# Altium PCB Main_.PcbDoc
Units mil, origin at the board's own origin, x right, y up, seen from the top; angles counter-clockwise.
Board outline 6000 x 4000 mil, 2 copper layers (Top Layer, Bottom Layer); 109 components, 96 nets, 475 pads, 21 vias.
Unrouted connection lines stored in the file: 299.
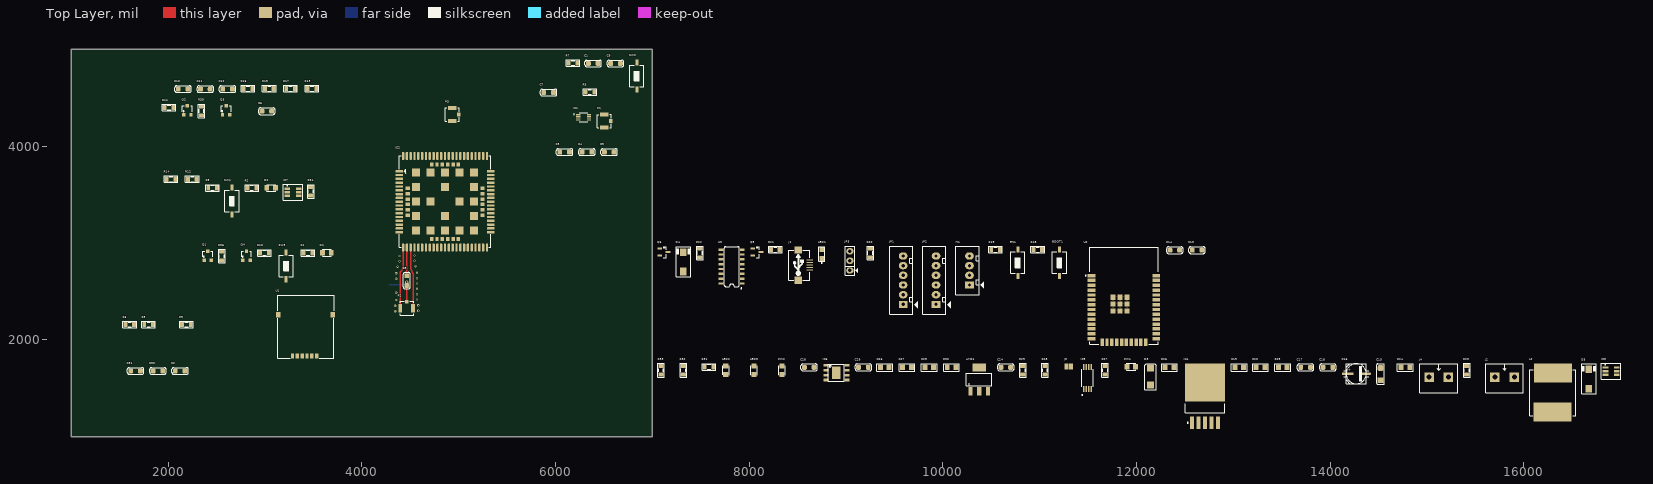
[diagram p0: Top Layer view]
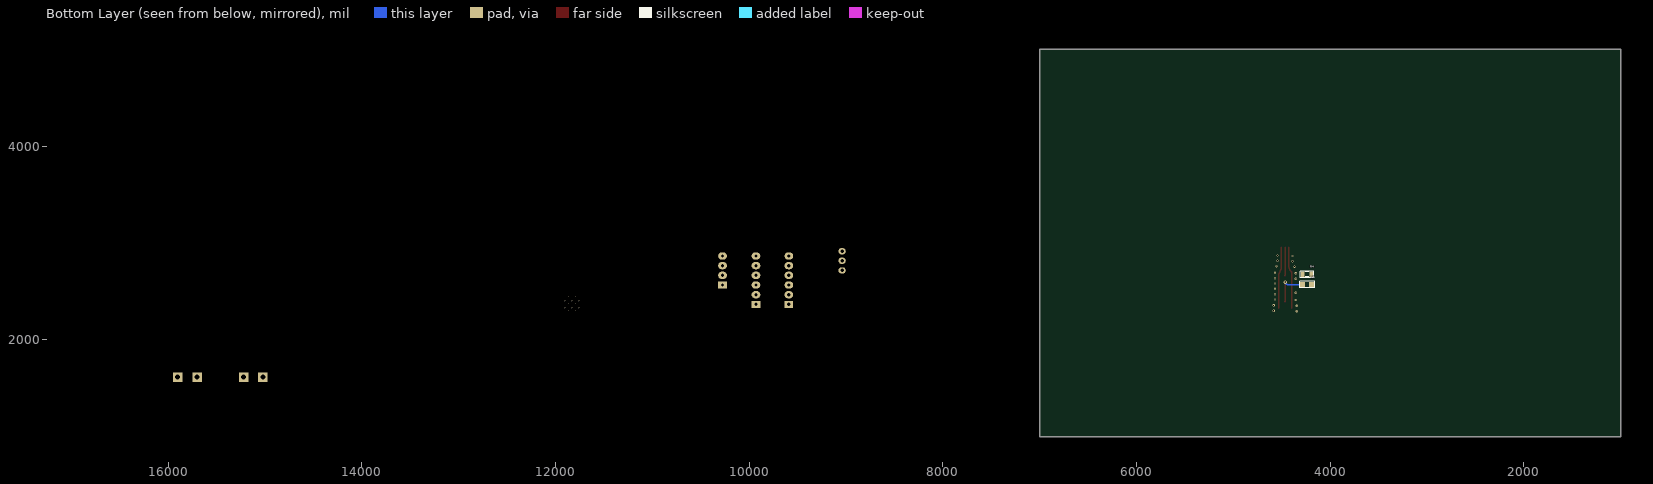
[diagram p1: Bottom Layer view, seen from below]

## Layer stack, top to bottom
Top Solder: solder mask 0.4, Solder Resist, Dk 3.5
Top Layer: signal copper 1.4
Dielectric 1: dielectric 12.6, FR-4, Dk 4.8
Bottom Layer: signal copper 1.4
Bottom Solder: solder mask 0.4, Solder Resist, Dk 3.5

## Board outline
1000,1000 7000,1000 7000,5000 1000,5000

## Design rules (kind name [scope] priority, off if disabled: settings)
Clearance [All] p1: gap=7 ignorepadtopadclearanceinfootprint=TRUE
DiffPairsRouting [All] p1: maxlimit=10 minlimit=10 mostfreqgap=10 toplayer_minwidth=15 toplayer_maxwidth=15 toplayer_prefwidth=15 bottomlayer_minwidth=15 bottomlayer_maxwidth=15 bottomlayer_prefwidth=15 maxuncoupledlength=500
PolygonConnect [All] p1: connectstyle=Relief reliefconductorwidth=10 reliefentries=4 polygonreliefangle="90 Angle" airgapwidth=10
RoomDefinition 2.MCU [InComponentClass('2.MCU')] p1: confinementstyle=ConfineIn formatcopy=TRUE lockcomponents=FALSE outline 7045,1915 12720,1915 12720,3075 7045,3075
RoomDefinition 1.POWER [InComponentClass('1.POWER')] p2: confinementstyle=ConfineIn formatcopy=TRUE lockcomponents=FALSE outline 7045,1060 17010,1060 17010,1865 7045,1865
RoutingVias [All] p1: holewidth=28 width=50 viastyle="Through Hole" minholewidth=10 minwidth=10 maxholewidth=100 maxwidth=100
SolderMaskExpansion [All] p1: expansion=4 istentingtop=FALSE
Width [All] p1: maxlimit=50 minlimit=7 preferedwidth=15
29 further rules are at their usual default settings.

## Classes and differential pairs
component class 3.4G: C1 C2 C3 C4 C5 C6 C7 C8 C9 C10 C11 C12 C30 C31 D1 D2 IC1 IC2 IC7 L L1 P1 P2 P3 Q1 Q2 Q3 Q4 R1 R2 R3 R4 R5 R6 R7 R8 R9 R10 R11 R12 R13 R14 R15 R16 R17 R34 R35 R36 SW1 SW2 SW3 U1
component class 2.MCU: BOOT1 C13 C14 D4 EN1 H1 J1 JP1 JP2 JP3 LED1 Q5 Q6 R18 R19 R20 R21 R22 U2 U3
component class 1.POWER: AMS1 C15 C16 C17 C18 C19 C20 C24 C25 C26 C27 C28 C29 D3 D5 IC3 IC4 IC5 IC6 J2 J3 J4 L2 LED2 LED3 PW1 PW2 R23 R24 R25 R26 R27 R28 R29 R30 R31 R32 R33
differential pair D0: +D0_P -D0_N

## Components (designator, comment, footprint, x,y, rotation, side; value= is the part's Value field where it differs from the comment)
AMS1 "AMS1117-3.3V" SOT223 10375,1590 r0 top value="AMS1117-3.3V SOT223"
BOOT1 "SW" SW-SMD 11205,2795 r90 top value="SW chip 2 pin"
C1 "100nF" CAP_0805 6390,4852.8 r0 top value=33p
C2 "100nF" CAP_0805 2125,1677.8 r0 top value=33p
C3 "10uF" CAP_0805 6095,3937.8 r0 top value=33p
C4 "100nF" CAP_0805 6325,3937.8 r0 top value=33p
C5 "100uF" CAP_0805 6555,3937.8 r0 top value=33p
C6 "104" CAP_0805 3020,4360 r180 top value=33p
C7 "104" CAP_0805 5930,4552.8 r0 top value=33p
C8 "33pF" CAP_0805 4465,2610 r270 top value=33p
C9 "100nF" CAP_0805 6620,4852.8 r0 top value=33p
C10 "22pF" CAP_0805 2155,4587.8 r0 top value=33p
C11 "22pF" CAP_0805 2385,4587.8 r0 top value=33p
C12 "22pF" CAP_0805 2615,4587.8 r0 top value=33p
C13 "100nF" CAP_0805 12625,2925 r0 top value=33p
C14 "1uF" CAP_0805 12395,2925 r0 top value=33p
C15 "220uF" CAP_TANTALUM_3216 14520,1645 r90 top
C16 "470uF/63V" CAP-ALU-SMD-C 14270,1650 r0 top value="Cap 470uF/63V"
C17 "100nF" CAP_0805 13745,1715 r0 top value=33p
C18 "100nF" CAP_0805 13975,1715 r0 top value=33p
C19 "4.7uF" C-0805 13060,1715 r0 top
C20 "4.7uF" C-0805 13280,1715 r0 top value=100nF
C24 "100nF" CAP_0805 10650,1715 r0 top value=33p
C25 "4.7uF" C-0805 9860,1715 r0 top
C26 "10nF" C-0805 9400,1715 r0 top value=10uF
C27 "10uF" C-0805 9630,1715 r0 top
C28 "100nF" CAP_0805 8620,1715 r0 top value=33p
C29 "100nF" CAP_0805 9180,1715 r0 top value=33p
C30 "104" CAP_0805 1895,1677.8 r0 top value=33p
C31 "10uF" CAP_0805 1665,1677.8 r0 top value=33p
D1 "NET" LED-0805-Blue 3595,2897.8 r0 top value="LED 3 ly Single Colour"
D2 "NET" LED-0805-Blue 3020,3567.8 r0 top value="LED 3 ly Single Colour"
D3 "Diode Zener" DIODE_ZENER_SMD 12145,1620 r90 top
D4 "M7" SMA 7320,2805 r90 top value=1N4007
D5 "M7" SMA 16670,1595 r90 top value=1N4007
EN1 "SW" SW-SMD 10775,2795 r90 top value="SW chip 2 pin"
H1 "Header 4P VH3.96 Duc Thang" CON4 10275,2565 r90 top
IC1 "TXB0102DCUR" SOP50P310X90-8N 6290,4297.8 r0 top
IC2 "SIM A7672S" A7672S 4860,3425 r0 top
IC3 "DW01A" SOT23-6 16900,1675 r0 top
IC4 "LM2596" TO-263 12705,1380 r90 top
IC5 "FS8205A" FS8205A 11495,1605 r90 top
IC6 "TP4056" TP4056 8900,1660 r0 top
IC7 "TPD4E001" SOT23-6 3290,3522.8 r0 top
J1 "USB-5" USB-M1 8625,2770 r90 top
J2 "JP2" KF2-5.08 15800,1615 r0 top
J3 "Jumper2" JUMPER2 11325,1725 r0 top
J4 "JP2" KF2-5.08 15120,1615 r0 top
JP1 "JP6 PIN" Header6 9590,2365 r90 top value=JP7
JP2 "JP6 PIN" Header6 9930,2365 r90 top value=JP7
JP3 "JP 1x3 2.54" JP3 9040,2815 r90 top
L1 "47nH" L-0805 4240,2570 r180 bottom value=220uH
L2 "33uH" Inductor_SMD 16060,1215 r0 top value=220uH
LED1 "LED3" LED0805 8750,2885 r90 top
LED2 "LED" LED-0805-Blue 7760,1640 r90 top value="LED 3 ly Single Colour"
LED3 "LED" LED-0805-Blue 8050,1640 r90 top value="LED 3 ly Single Colour"
P1 "IPX" IPXS 6555,4257.8 r0 top
P2 "IPX" IPXS 4465,2375 r90 top
P3 "IPX" IPXS 4985.12,4325.28 r0 top
PW1 "3V8" LED-0805-Blue 11900,1720 r0 top value=Red
PW2 "LED 0805" LED-0805-Blue 8340,1640 r90 top value=Red
Q1 "3904" SOT23 2410,2867.8 r0 top
Q2 "3904" SOT23 2200,4367.8 r0 top
Q3 "2SC1815" SOT23 2600,4367.8 r0 top value=C1815
Q4 "2SC1815" SOT23 2810,2867.8 r0 top value=C1815
Q5 "BC817" SOT95P240X97-3N 8080,2905 r0 top
Q6 "BC817" SOT95P240X97-3N 7120,2905 r0 top
R1 "1K" RES-SMD-0805 3445,2897.8 r0 top
R2 "1K" RES-SMD-0805 2865,3567.8 r0 top
R3 "1K" RES-SMD-0805 6355,4557.8 r0 top
R4 "10R" RES-SMD-0805 4240,2675 r0 bottom
R5 "10k" RES-SMD-0805 1800,2157.8 r0 top
R6 "10k" RES-SMD-0805 1605,2157.8 r0 top
R7 "0R" RES-SMD-0805 6180,4857.8 r0 top
R8 "4k7" RES-SMD-0805 2460,3567.8 r0 top value="R1/4W - 1K"
R9 "10k" RES-SMD-0805 2190,2157.8 r0 top
R10 "4k7" RES-SMD-0805 2995,2897.8 r0 top value="R1/4W - 1K"
R11 "47k" RES-SMD-0805 2010,4397.8 r0 top value="R1/4W - 1K"
R12 "47k" RES-SMD-0805 2250,3657.8 r0 top value="R1/4W - 1K"
R13 "10k" RES-SMD-0805 3485,4592.8 r0 top value="R1/4W - 1K"
R14 "10k" RES-SMD-0805 2030,3657.8 r0 top value="R1/4W - 1K"
R15 "22R" RES-SMD-0805 3045,4592.8 r0 top
R16 "22R" RES-SMD-0805 2825,4592.8 r0 top
R17 "22R" RES-SMD-0805 3265,4592.8 r0 top
R18 "10k" RES-SMD-0805 10980,2930 r0 top
R19 "10k" RES-SMD-0805 10545,2930 r0 top
R20 "1k" RES-SMD-0805 9250,2895 r90 top
R21 "10k" RES-SMD-0805 8270,2930 r0 top
R22 "10k" RES-SMD-0805 7490,2895 r90 top
R23 "0.1k" RES-SMD-0805 15410,1685 r90 top
R24 "10k" R-0805 14775,1715 r0 top
R25 "1k" R-0805 13510,1715 r0 top
R26 "4.7k" R-0805 12340,1715 r0 top value=3.3k
R27 "1k" RES-SMD-0805 11675,1685 r90 top
R28 "30k" RES-SMD-0805 11055,1685 r90 top
R29 "100k" RES-SMD-0805 10825,1685 r90 top
R30 "1k" R-0805 10090,1715 r0 top
R31 "1k" RES-SMD-0805 7585,1720 r0 top
R32 "1k" RES-SMD-0805 7320,1685 r90 top
R33 "1k2" RES-SMD-0805 7090,1685 r90 top
R34 "0R" RES-SMD-0805 3475,3532.8 r90 top
R35 "330R" RES-SMD-0805 2345,4362.8 r90 top
R36 "330R" RES-SMD-0805 2555,2862.8 r90 top
SW1 "SW" SW-SMD 2660,3432.8 r90 top value="SW chip 2 pin"
SW2 "SW" SW-SMD 6840,4722.8 r90 top value="SW chip 2 pin"
SW3 "SW" SW-SMD 3220,2762.8 r90 top value="SW chip 2 pin"
U1 "SIM-KF016" "SIM_MicroSIM 6P Flip" 3420,2045 r0 top value="Sim holder"
U2 "ESP32-WROOM-32" MODULE_ESP32-WROOM-32 11870,2455 r0 top
U3 "CH340C" SOP-16 7820,2755 r90 top

## Footprints (in the part's own frame and the unit in brackets; to place one, negate y for a bottom-side part, rotate by r counter-clockwise, add the part's x,y. Pads: shape width x height; smd on the part's side, far side on the other; paste and mask are expansions set on the pad)
A7672S [mm] "SIMCOM A7672S"
  rrect50% 2x0.635 smd: 1(-12,8) 2(-12,7) 3(-12,6) 4(-12,5) 5(-12,4) 6(-12,3) 7(-12,2) 8(-12,1) 9(-12,0) 10(-12,-1) 11(-12,-2) 12(-12,-3) 13(-12,-4) 14(-12,-5) 15(-12,-6) 16(-12,-7) 17(-12,-8) 35(12,-8) 36(12,-7) 37(12,-6) 38(12,-5) 39(12,-4) 40(12,-3) 41(12,-2) 42(12,-1) 43(12,0) 44(12,1) 45(12,2) 46(12,3) 47(12,4) 48(12,5) 49(12,6) 50(12,7) 51(12,8)
  rrect50% 0.635x2 smd: 18(-8,-12) 19(-7,-12) 20(-6,-12) 21(-5,-12) 22(-4,-12) 23(-3,-12) 24(-2,-12) 25(-1,-12) 26(0,-12) 27(1,-12) 28(2,-12) 29(3,-12) 30(4,-12) 31(5,-12) 32(6,-12) 33(7,-12) 34(8,-12) 52(8,12) 53(7,12) 54(6,12) 55(5,12) 56(4,12) 57(3,12) 58(2,12) 59(1,12) 60(0,12) 61(-1,12) 62(-2,12) 63(-3,12) 64(-4,12) 65(-5,12) 66(-6,12) 67(-7,12) 68(-8,12) 89(-11,-12) 90(-10,-12) 91(-9,-12) 92(9,-12) 93(10,-12) 94(11,-12) 95(11,12) 96(10,12) 97(9,12) 98(-9,12) 99(-10,12) 100(-11,12)
  rect 2.1x2.1 smd: 69(-7.6,7.6) 70(-7.6,3.8) 71(-7.6,0) 72(-7.6,-3.8) 73(-7.6,-7.6) 74(-3.8,-7.6) 75(0,-7.6) 76(3.8,-7.6) 77(7.6,-7.6) 78(7.6,-3.8) 79(7.6,0) 80(7.6,3.8) 81(7.6,7.6) 82(3.8,7.6) 83(0,7.6) 84(-3.8,7.6) 85(-3.8,0) 86(0,-3.8) 87(3.8,0) 88(0,3.8)
  rect 1.1x0.9 smd: 101(-9.8,3.5) 102(-9.8,2.1) 103(-9.8,0.7) 104(-9.8,-0.7) 105(-9.8,-2.1) 106(-9.8,-3.5) 113(9.8,-3.5) 114(9.8,-2.1) 115(9.8,-0.7) 116(9.8,0.7) 117(9.8,2.1) 118(9.8,3.5)
  rect 0.9x1.1 smd: 107(-3.5,-9.8) 108(-2.1,-9.8) 109(-0.7,-9.8) 110(0.7,-9.8) 111(2.1,-9.8) 112(3.5,-9.8) 119(3.5,9.8) 120(2.1,9.8) 121(0.7,9.8) 122(-0.7,9.8) 123(-2.1,9.8) 124(-3.5,9.8)
  silkscreen extent -12,-12 12,12, body extent -12,-12 12,12, height 2.6
C-0805 [mil] "Compoment SMD 80x50mil"
  rect 50x55 smd: 1(-45,0) 2(45,0)
  silkscreen extent -81,-39 81,39, body extent -40,-25 40,25, height 24
CAP-ALU-SMD-C [mm]
  rect 3x0.7 smd: 1(-2.286,0)
  oval 3x0.7 smd: 2(2.286,0)
  silkscreen extent -3.35,-2.65 3.28,2.65, body extent -2.95,-2.65 2.95,2.65, height 5.41
CAP_0805 [mil]
  rrect50% 50x50 smd: 1(-50,0) 2(50,0)
  silkscreen extent -85,-35 85,35, body extent -40,-25 40,25, height 24
CAP_TANTALUM_3216 [mil]
  rect 60x60 smd: 1(-62.99,0)
  rrect50% 60x60 smd: 2(62.99,0)
  silkscreen extent -105,-40 105,40, body extent -67,-35 67,35, height 67
CON4 [mil] "CON4"
  rect 75x90 hole 34: 1(0,0)
  oval 75x90 hole 34: 2(100,0) 3(200,0) 4(300,0)
  silkscreen extent -100,-150 400,140, body extent -90,-90 398,136, height 276
DIODE_ZENER_SMD [mil]
  rect 70x70 smd: 1(-88.58,0) 2(88.58,0)
  silkscreen extent -135,-60 134,60, body extent -69,-29 69,29, height 57
FS8205A [mm]
  rrect25% 1.56x0.4 smd: 1(-2.88,1.031) 2(-2.88,0.381) 3(-2.88,-0.269) 4(-2.88,-0.919) 5(2.88,-0.919) 6(2.88,-0.269) 7(2.88,0.381) 8(2.88,1.031)
  silkscreen extent -4.54,-1.46 2.25,1.57, body extent -3.2,-1.4 3.2,1.53, height 1.2
Header6 [mil] "CON6"
  rect 75x90 hole 34: 1(0,0)
  oval 75x90 hole 34: 2(100,0) 3(200,0) 4(300,0) 5(400,0) 6(500,0)
  silkscreen extent -100,-150 600,140
Inductor_SMD [mm]
  rect 10x5 smd: 1(6.096,11.176) 2(6,1)
  silkscreen extent 0,0 12.1,12.1, body extent 0.1,-0.2 12.1,12.14, height 7.15
IPXS [mm] "SOT 23 _ 1-3-2"
  rect 1x1 smd: 1(0.415,-0.01)
  rect 2.2x1 smd: 2(-1.273,-1.658) 3(-1.278,1.73)
  silkscreen extent -3.13,-1.79 0.53,1.73, body extent -2.83,-1.49 0.31,1.56, height 1.55
JP3 [mil] "Jumper 3"
  oval 65x75 hole 36: 1(-100,0) 2(1,0) 3(99,0)
  silkscreen extent -150,-81 150,50, body extent -150,-60 150,55, height 355
JUMPER2 [mil]
  rect 40x60 smd: 1(-50,0) 2(0,0)
KF2-5.08 [mm]
  rect 2.5x2.5 hole 1.3: 1(-2.54,0) 2(2.54,0)
  silkscreen extent -4.95,-4.08 4.95,3.43, body extent -5,-4.07 5,3.43, height 10
L-0805 [mil] "Compoment SMD 80x50mil"
  rect 50x55 smd: 1(-45,0) 2(45,0)
  silkscreen extent -77,-34 78,33, body extent -50,-20 50,20, height 43
LED0805 [mil] "Chip Resistor; Body 2.0 x 1.3 mm (LxW typ)"
  rect 50x50 smd: 1(-45,0) 2(45,0)
  silkscreen extent -97,-33 77,33, body extent -60,-25 60,25, height 47
LED-0805-Blue [mil]
  rect 50x55 smd: 1(0,0) 2(90,0)
  silkscreen extent 0,-35 90,35, body extent 5,-25 85,25, height 43
MODULE_ESP32-WROOM-32 [mm]
  rect 2x0.9 smd: 1(-8.5,5.26) 2(-8.5,3.99) 3(-8.5,2.72) 4(-8.5,1.45) 5(-8.5,0.18) 6(-8.5,-1.09) 7(-8.5,-2.36) 8(-8.5,-3.63) 9(-8.5,-4.9) 10(-8.5,-6.17) 11(-8.5,-7.44) 12(-8.5,-8.71) 13(-8.5,-9.98) 14(-8.5,-11.25) 25(8.5,-11.25) 26(8.5,-9.98) 27(8.5,-8.71) 28(8.5,-7.44) 29(8.5,-6.17) 30(8.5,-4.9) 31(8.5,-3.63) 32(8.5,-2.36) 33(8.5,-1.09) 34(8.5,0.18) 35(8.5,1.45) 36(8.5,2.72) 37(8.5,3.99) 38(8.5,5.26)
  rect 0.9x2 smd: 15(-5.715,-12.25) 16(-4.445,-12.25) 17(-3.175,-12.25) 18(-1.905,-12.25) 19(-0.635,-12.25) 20(0.635,-12.25) 21(1.905,-12.25) 22(3.175,-12.25) 23(4.445,-12.25) 24(5.715,-12.25)
  rect 1.33x1.33 smd: 39_1(-2.835,-0.405) 39_2(-1,-0.405) 39_3(0.835,-0.405) 39_4(-2.835,-2.24) 39_5(-1,-2.24) 39_6(0.835,-2.24) 39_7(-2.835,-4.075) 39_8(-1,-4.075) 39_9(0.835,-4.075)
  round 0.3 hole 0.2: 39_10(-1.917,-0.405) 39_11(-0.082,-0.405) 39_12(-2.835,-1.322) 39_13(-1,-1.322) 39_14(0.835,-1.322) 39_15(-1.917,-2.24) 39_16(-0.082,-2.24) 39_17(-2.835,-3.157) 39_18(-1,-3.157) 39_19(0.835,-3.157) 39_20(-1.917,-4.075) 39_21(-0.082,-4.075)
  silkscreen extent -10.1,-12.75 9,12.75, body extent -9.02,-12.75 8.98,12.75, height 3.2
R-0805 [mil] "Compoment SMD 80x50mil"
  rect 50x55 smd: 1(-45,0) 2(45,0)
  silkscreen extent -81,-39 81,39, body extent -39,-25 39,25, height 31
RES-SMD-0805 [mil]
  rect 39.37x55 smd: 1(-45,0) 2(45,0)
  silkscreen extent -70,-34 70,33, body extent -39,-25 39,25, height 31
"SIM_MicroSIM 6P Flip" [mm]
  rect 0.85x1.4 smd: 1(-2.16,-5.415) 2(0.38,-5.415) 3(2.92,-5.415) 5(-3.43,-5.415) 6(-0.89,-5.415) 7(1.65,-5.415)
  rect 1.2x1.5 smd: 8(-7.15,5.415) 8(7.15,5.415)
  Top Layer pour cut-out: 3.683,-2.79 -4.293,-2.79 -4.293,1.96 3.683,1.96
  Top Layer pour cut-out: 3.683,8.788 -4.293,8.788 -4.293,4.039 3.683,4.039
  silkscreen extent -7.35,-6.02 7.35,10.52, body extent -7.61,-5.89 7.59,10.41, height 1.7
SMA [mm]
  rect 2x1.7 smd: 1(-2.544,0) 2(2.544,0)
  silkscreen extent -3.94,-1.9 3.94,1.91, body extent -2.87,-1.4 2.87,1.4, height 2.29
SOP50P310X90-8N [mm]
  rrect25% 1.12x0.27 smd: 1(-1.405,0.75) 2(-1.405,0.25) 3(-1.405,-0.25) 4(-1.405,-0.75) 5(1.405,-0.75) 6(1.405,-0.25) 7(1.405,0.25) 8(1.405,0.75)
  silkscreen extent -2.62,-1.2 1.15,1.2
SOP-16 [mm]
  rect 0.6x1.2 smd: 1(-4.445,-2.8) 2(-3.175,-2.8) 3(-1.905,-2.8) 4(-0.635,-2.8) 5(0.635,-2.8) 6(1.905,-2.8) 7(3.175,-2.8) 8(4.445,-2.8) 9(4.445,2.8) 10(3.175,2.8) 11(1.905,2.8) 12(0.635,2.8) 13(-0.635,2.8) 14(-1.905,2.8) 15(-3.175,2.8) 16(-4.445,2.8)
  silkscreen extent -5.84,-2.67 5.26,1.95, body extent -4.95,-3.47 4.95,3.47, height 1.75
SOT23 [mm] "SOT-23; 3 Leads; Body 3.1 x 2.5 mm, inc. leads (LxW max), Alternate Lead Configuration"
  rect 0.9x0.95 smd: 1(-0.95,-1.175) 2(0,1.175) 3(0.95,-1.175)
  silkscreen extent -1.3,-0.38 1.3,1.18
SOT23-6 [mm] "SOT23, 5-Leads, Body 3.0x3.0mm (max), Pitch 0.95mm, IPC Medium Density"
  rect 1.5x0.6 smd: 1(-1.5,0.95) 2(-1.5,0) 3(-1.5,-0.95) 4(1.5,-0.95) 5(1.5,0) 6(1.5,0.95)
  silkscreen extent -2.54,-2.11 2.54,2.11, body extent -1.75,-1.52 1.75,1.53, height 1.45
SOT95P240X97-3N [mil]
  rect 48x21 smd: 1(-42,37) 2(-42,-37) 3(42,0)
  silkscreen extent -9,-57 26,57
SOT223 [mm] "SOT-223/SC-73; 4 Leads; Body 6.7 x 7.3 mm, inc. leads (LxW max)"
  rect 1.1x2.15 smd: 1(-2.3,-3.1) 2(0,-3.1) 3(2.3,-3.1)
  rect 3.5x2.15 smd: 4(0,3.1)
  silkscreen extent -3.35,-1.63 3.35,1.63, body extent -3.43,-1.65 3.43,1.65, height 2.54
SW-SMD [mm] "Switch SMD type"
  rect 1.6x0.8 smd: 1(-3.5,0) 2(3.5,0)
  silkscreen extent -2.82,-1.85 2.82,1.85, body extent -3.05,-1.85 3.05,1.85, height 2.5
TO-263 [mm]
  rect 3.2x1.05 smd: 1(-6,3.4) 2(-6,1.7) 3(-6,0) 4(-6,-1.7) 5(-6,-3.4)
  rect 10x10.45 smd: 6(4.5,0)
  silkscreen extent -6.12,-5.2 -1.1,5.2, body extent -6.58,-5.2 7.57,5.2, height 4.65
TP4056 [mm]
  rect 1.3x0.7 smd: 1(-2.75,1.905) 2(-2.75,0.635) 3(-2.75,-0.635) 4(-2.75,-1.905) 5(2.75,-1.905) 6(2.75,-0.635) 7(2.75,0.635) 8(2.75,1.905)
  rect 2.3x3.2 smd: 3(-0.025,0)
  silkscreen extent -2.1,-2.2 2.1,2.2, body extent -3.13,-2.45 2.87,2.45, height 1.75
USB-M1 [mil]
  rect 10x70 smd: 1(51.18,0) 2(25.59,0) 3(0,0) 4(-25.59,0) 5(-50,0)
  rect 74.8x74.8 smd: 5(-155.51,116.84) 5(155.51,116.84)
  silkscreen extent -155,-1 155,215, body extent -157,5 158,218, height 107

## Part data
AMS1: library part "AMS1117 SMD", "Dán", Chung_Loai=Dán, Don_Vi=Con, Ma_Hang=MH000596
BOOT1 EN1 SW1 SW2 SW3: library part SW2, "Switch button 2 pin"
C1: library part CapSMD_5, "Capacitor", LatestRevisionDate=17-Jul-2002, LatestRevisionNote="Re-released for DXP Platform.", PackageReference=RAD-0.3, Published=8-Jun-2000, Publisher="Altium Limited"
C2 C3 C4 C5 C6 C7: library part CapSMD_9, "Capacitor", LatestRevisionDate=17-Jul-2002, LatestRevisionNote="Re-released for DXP Platform.", PackageReference=RAD-0.3, Published=8-Jun-2000, Publisher="Altium Limited"
C8 C31: library part CapSMD_1, "Capacitor", LatestRevisionDate=17-Jul-2002, LatestRevisionNote="Re-released for DXP Platform.", PackageReference=RAD-0.3, Published=8-Jun-2000, Publisher="Altium Limited"
C9 C10 C11 C12 C13 C14 C17 C18 C24 C28 C29 C30: library part CapSMD, "Capacitor", LatestRevisionDate=17-Jul-2002, LatestRevisionNote="Re-released for DXP Platform.", PackageReference=RAD-0.3, Published=8-Jun-2000, Publisher="Altium Limited"
C15: library part CP5, "220µF Molded Tantalum Polymer Capacitor 16V 2917 (7343 Metric) 40mOhm @ 100kHz", Manufacturer="AVX Corporation", Package=2917, Part Number=TCME227M016R0040E, Category=CAPACITOR, User_Description="CAP TANT POLY 220UF 16V 2917"
C16: library part CP3, "Cap 470uF/63V"
C19 C20 C25: library part C, "4.7µF ±10% 35V Ceramic Capacitor X5R 0805 (2012 Metric)", Manufacturer="Samsung Electro-Mechanics", Package=0805, Part Number=CL21A475KLCLQNC, Category=CAPACITOR, User_Description="CAP CER 4.7UF 35V X5R 0805"
C26 C27: library part C, "Cap SMD", Manufacturer="Samsung Electro-Mechanics", Package=0805, Part Number=CL21A106KPFNNNG, Category=CAPACITOR, User_Description="CAP CER 10UF 10V X5R 0805"
D1 D2: library part LED_2, "LED Single colour Green and Red"
D3: "Zener Diode", LatestRevisionDate=17-Jul-2002, LatestRevisionNote="Re-released for DXP Platform.", PackageReference=DIODE-0.7, Published=8-Jun-2000, Publisher="Altium Limited"
D4 D5: library part D1A, "Diode 1A"
H1: "Cắm", Chung_Loai=Cắm, Don_Vi=Con, Ma_Hang=MH001285, Ten_Linh_Kien="Header 4P XH2.54-4P Đực Thẳng"
IC1: "IC TRNSLTR BIDIRECTIONAL US8", Manufacturer="Texas Instruments", Package=8-VSSOP, Category="IC Logic Level", Part Number=TXB0102DCUR, User_Description="IC TRNSLTR BIDIRECTIONAL US8"
IC2: "SIM A7672S-CAT-M1", Part Number="SIM A7672S"
IC3: "One Cell Lithium-ion/Polymer Battery Protection IC"
IC4: library part LM2576, "LM2576"
IC6: "Complete single cell Li-Ion battery with a constant current / constant voltage linear charger"
IC7: library part TPD4E001_1, Manufacturer="Texas Instruments", Package=SOT-363, Part Number=TPD4E001RDBVR, Category="Circuit Protection", User_Description="TVS DIODE 5.5VWM SC70-6"
J1: Manufacturer=FCI, Manufacturer Part Number=10118193-0001LF, Supplier Part Number 1=609-4616-1-ND, .Checked PCB=RF, .Checked SCH=MM, .Creator=MM, Category="Connectors, Interconnects", ComponentLink1Description=http://portal.fciconnect.com/Comergent//fci/drawing/10118193.pdf, ComponentLink1URL=http://portal.fciconnect.com/Comergent//fci/drawing/10118193.pdf, Connector Type="USB - micro B", Features="Shielded, Solder Retention", Gender=Receptacle, Ingress Protection=-, Mounting Type="Surface Mount, Right Angle, Horizontal", Number of Contacts=5, Packaging="Cut Tape (CT)", Pricing 1="1=0.46, 10=0.433, 25=0.3712, 50=0.3156, 100=0.3032, 250=0.27224, 500=0.25988 (USD)", RoHS="RoHS Compliant", Specifications="USB 2.0", Stock 1=28642, Supplier 1=Digi-Key
J2 J4: "WR-PHD 2.54 mm Angled Socket Header", Manufacturer="W¨¹rth Elektronik eiSos GmbH", partNo=613002143121, ComponentLink1 Description=Manufacturer, ComponentLink1URL=http://www.we-online.com, ComponentLink2 Description=Datasheet, ComponentLink2URL=http://katalog.we-online.de/em/datasheet/6130xx143121.pdf, Created by="Karrer Zheng", Created Date="29 March 2013", NoPins=02
J3: "Jumper, 2-Pin"
JP1 JP2: library part JP6
JP3: library part "JP 1x3 2.54 Cai Thang", "Cắm", Chung_Loai=Cắm, Don_Vi=Con, Ma_Hang=MH004006, Ten_Linh_Kien="Jump Đơn Cái 2.54MM 1x20P Thẳng"
L1 L2: library part L1, "22µH Shielded Inductor 1.65A 96mOhm Max Nonstandard", Manufacturer="Bourns Inc.", Package=SMD, Part Number=SRR0745A-220M, Category=INDUCTORS, User_Description="FIXED IND 22UH 1.65A 96 MOHM SMD"
LED1: library part LED0805, "LED SMD 0805"
LED2 LED3: "LED Single colour Green and Red"
P1 P2 P3: library part IPXSx66, "Antenna GSM GPS", Manufacturer="TE Connectivity AMP Connectors", Package=SMD, Part Number=2334884-1, Category=Connectors, User_Description="UMCC MICRO-COAX RECEPTACLE, GEN"
PW1 PW2: library part LED, "LED RED DIFFUSED 0805 SMD", Manufacturer="OSRAM Opto Semiconductors Inc.", Package=0805, Part Number="LS R976-NR-1", Category="LED SMD", User_Description="LED RED DIFFUSED 0805 SMD"
Q1 Q2: library part MMBT3904
Q3 Q4: "NPN 600mW, ECB"
Q5 Q6: "Bipolar (BJT) Transistor NPN 45V 500mA 100MHz 250mW Surface Mount TO-236AB", Package="SOT-23-3 Rectron", Availability="In Stock", Check_prices=https://www.snapeda.com/parts/BC817/Rectron/view-part/?ref=eda, MF=Rectron, MP=BC817, Price=None, Purchase-URL=https://pricing.snapeda.com/search/part/BC817/?ref=eda, SnapEDA_Link=https://www.snapeda.com/parts/BC817/Rectron/view-part/?ref=snap
R1 R2 R3 R35 R36: library part "Resistor - SMD", "Resistor", Manufacturer="Generic Components", Class=Passive, Published=08/06/2000, Publisher="Altium Hobart Technology Centre"
R4 R5 R6 R7 R9 R15 R16 R17 R18 R19 R20 R21 R22 R23 R27 R28 R29 R31 R32 R33 R34: library part "Resistor - SMD", "Resistor SMD", Manufacturer="Generic Components", Class=Passive, Published=08/06/2000, Publisher="Altium Hobart Technology Centre"
R8 R10 R11 R12 R13 R14: library part R, "Resistor 1/4W"
R24: library part R, "RES SMD 10K OHM 1% 1/8W 0805", Manufacturer=Yageo, Package=0805, Part Number=RC0805FR-0710KL, Category=RESISTORS, User_Description="RES SMD 10K OHM 1% 1/8W 0805"
R25 R30: library part R, "Resistor 1/4W", Manufacturer=Yageo, Package=0805, Part Number=RC0805FR-071KL, Category=RESISTORS, User_Description="RES SMD 1K OHM 1% 1/8W 0805"
R26: library part R, "RES SMD 3.3K OHM 1% 1/8W 0805", Manufacturer=Yageo, Package=0805, Part Number=RC0805FR-073K3L, Category=RESISTORS, User_Description="RES SMD 3.3K OHM 1% 1/8W 0805"
U1: library part "Sim holder", "SIM Card Holder KF-016"
U2: "Bluetooth, WiFi 802.11b/g/n, Bluetooth v4.2 +EDR, Class 1, 2 and 3 Transceiver Module 2.4GHz ~ 2.5GHz Antenna Not Included, U.FL Surface Mount", Package="Module Espressif Systems", Availability="In Stock", Check_prices=https://www.snapeda.com/parts/ESP32-WROOM-32/Espressif+Systems/view-part/?ref=eda, MF="Espressif Systems", MP=ESP32-WROOM-32, Price=None, Purchase-URL=https://pricing.snapeda.com/search/part/ESP32-WROOM-32/?ref=eda, SnapEDA_Link=https://www.snapeda.com/parts/ESP32-WROOM-32/Espressif+Systems/view-part/?ref=snap
U3: "USB to serial chip CH340", Package=Package, Availability=Unavailable, Check_prices=https://www.snapeda.com/parts/CH340C/WCH/view-part/5428851/?ref=eda, MF=WCH, MP=CH340C, Price=None, SnapEDA_Link=https://www.snapeda.com/parts/CH340C/WCH/view-part/5428851/?ref=snap

## Via types
v1: diameter 24, hole 12, Top Layer to Bottom Layer, 20 vias
v2: diameter 35, hole 20, Top Layer to Bottom Layer, 1 vias

## Nets (pads, with @x,y where several pads share a name; then routed paths per layer and width w, separated by ;. In a path a pad name is that pad's centre, name@x,y a point inside that pad or via, vN(x,y) a via of type N, cw(c..) or ccw(c..) an arc to the next point about the centre after c; other vN are vias at no path point)
1V8: C7.2 C31.2 IC1.3 IC2.15 R3.2 R7.1
3V3: AMS1.2 AMS1.4 C1.2 C6.2 C13.1 C14.1 C27.1 H1.3 IC1.7 JP1.5 JP2.5 JP3.1 R9.2 R18.1 R19.1 R30.2 U2.2 U3.4 U3.16
3V8: AMS1.3 C2.2 C3.2 C4.2 C5.2 C15.1 C25.2 C26.1 IC2.55 IC2.56 IC2.57 L2.2 R1.1 R2.1 R24.2 R25.1
5V: C28.1 D4.2 IC6.4 IC6.8 LED2.1 LED3.1
ADC: JP3.2 U2.11
CH340_RX: U2.35 U3.3
CH340_TX: U2.34 U3.2
CS: JP2.4 U2.29
CS2: JP1.4 U2.23
D0_N: J1.2 U3.6
D0_P: J1.3 U3.5
D_N: IC2.28
D_P: IC2.27
DATA: IC2.5
EN: EN1.1 Q6.3 R19.2 U2.3
GND: AMS1.1 BOOT1.2 C1.1 C2.1 C3.1 C4.1 C5.1 C6.1 C7.1 C9.1 C10.2 C11.2 C12.2 C13.2 C14.2 C15.2 C16.2 C18.1 C19.1 C20.1 C24.1 C25.1 C26.2 C27.2 C28.2 C29.1 C30.2 C31.1 D3.1 EN1.2 H1.4 IC1.2 IC2.2 IC2.17 IC2.18 IC2.29 IC2.39 IC2.45 IC2.46 IC2.54 IC2.58 IC2.59 IC2.61 IC2.62 IC2.63 IC2.64 IC2.65 IC2.89 IC2.91 IC2.92 IC2.94 IC4.3 IC4.5 IC4.6 IC5.6 IC5.7 IC6.1 IC6.3 IC7.2 J1.5 J3.2 JP1.6 JP2.6 JP3.3 LED1.2 P1.2 P1.3 P2.2 P2.3 P3.2 P3.3 PW1.2 PW2.2 Q1.2 Q2.2 Q3.1 Q4.1 R11.1 R12.1 R13.1 R14.1 R26.1 R27.2 R29.1 R33.2 SW2.2 U1.5 U1.8 U2.1 U2.15 U2.38 U2.39_1 U2.39_2 U2.39_3 U2.39_4 U2.39_5 U2.39_6 U2.39_7 U2.39_8 U2.39_9 U2.39_10 U2.39_11 U2.39_12 U2.39_13 U2.39_14 U2.39_15 U2.39_16 U2.39_17 U2.39_18 U2.39_19 U2.39_20 U2.39_21 U3.1 | length 1268.5
  Top Layer w16: P2.3 4396.91,2685.47 cw(c4424.53,2685.47) 4405,2705 ccw(c4352.06,2757.94) 4426.93,2757.94 IC2.89 ; IC2.91 4505.67,2734.13 4530.28,2674.72 4530.28,2360.19 P2.2
  other v1: 4345,2295 4585,2300 4345,2350 4585,2355 4355,2410 4570,2415 4570,2470 4355,2485 4570,2525 4570,2580 4355,2630 4570,2635 4355,2685 4570,2690 4370,2755 4555,2760 4390,2810 4545,2815 4390,2865 4545,2870
IO2: R20.1 U2.24
IO_0: BOOT1.1 Q5.3 R18.2 U2.25
LOG_RX: IC2.22
LOG_TX: IC2.23
MISO: JP2.2 U2.31
MISO2: JP1.2 U2.14
MOSI: JP2.3 U2.37
MOSI2: JP1.3 U2.16
NET: IC2.52
NetC8_1: C8.1 IC2.90 | length 294.1
  Top Layer w16: IC2.90 4466.3,2663.7 C8.1@4470,2660
NetC8_2: C8.2 L1.1 P2.1 | length 400.2
  Top Layer w16: v2(4465,2595) C8.2 4465,2396.73 P2.1@4470.39,2391.34
  Bottom Layer w16: L1.1 4440,2570 ccw(c4440,2595) v2(4465,2595)
NetC9_2: C9.2 IC2.6 R9.1 SW2.1
NetC16_1: C16.1 C19.2 C20.2 D5.2 IC4.1
NetC17_1: C17.1 IC3.6 IC5.2 IC5.3 J2.2 J3.1
NetC17_2: C17.2 IC3.5 R23.1
NetC24_2: C24.2 R28.1 R29.2 U2.10
NetD1_1: D1.1 R1.2
NetD1_2: D1.2 Q1.3
NetD2_1: D2.1 R2.2
NetD2_2: D2.2 Q2.3
NetD3_2: D3.2 IC4.2 L2.1
NetD4_1: D4.1 J1.1
NetD5_1: D5.1 J4.2
NetIC1_6: IC1.6 R3.1
NetIC2_20: IC2.20 R34.1
NetIC2_49: IC2.49 R6.2
NetIC2_50: IC2.50 R5.2
NetIC2_60: IC2.60 P3.1
NetIC2_93: IC2.93 P1.1
NetIC2_95: IC2.95 R6.1
NetIC2_96: IC2.96 R5.1
NetIC2_97: IC2.97 IC2.116 R7.2
NetIC2_98: IC2.98 R34.2
NetIC2_99: IC2.99 R4.2
NetIC3_1: IC3.1 IC5.4
NetIC3_2: IC3.2 R27.1
NetIC3_3: IC3.3 IC5.5
NetIC4_4: IC4.4 R24.1 R26.2
NetIC5_1: IC5.1 IC5.8
NetIC6_2: IC6.2 R33.1
NetIC6_6: IC6.6 R32.2
NetIC6_7: IC6.7 R31.2
NetIC7_1: IC7.1 R16.2 U1.2
NetIC7_3: IC7.3 R17.2 U1.7
NetIC7_6: IC7.6 R15.1 U1.3
NetL1_2: L1.2 R4.1
NetLED1_1: LED1.1 R20.2
NetLED2_2: LED2.2 R32.1
NetLED3_2: LED3.2 R31.1
NetPW1_1: PW1.1 R25.2
NetPW2_1: PW2.1 R30.1
NetQ1_1: Q1.1 R36.2
NetQ2_1: Q2.1 R35.2
NetQ3_3: Q3.3 R8.1 R11.2
NetQ4_3: Q4.3 R10.1 R12.2
NetQ5_1: Q5.1 R21.2
NetQ5_2: Q5.2 R22.1 U3.13
NetQ6_1: Q6.1 R22.2
NetQ6_2: Q6.2 R21.1 U3.14
NetR8_2: R8.2 U2.8
NetR10_2: R10.2 U2.12
NetR13_2: R13.2 SW1.2
NetR14_2: R14.2 SW3.2
POWER_ON: IC2.1 Q4.2 SW3.1
RESET: IC2.16 Q3.2 SW1.1
RX: IC1.8 U2.27
SCK: JP2.1 U2.30
SCK2: JP1.1 U2.13
SCL: H1.2 U2.36
SDA: H1.1 U2.33
SIM_PPS: IC2.100 R35.1
SIM_RX: IC1.4 IC2.10
SIM_TX: IC1.5 IC2.9
STATUS: IC2.66 R36.1
TX: IC1.1 U2.28
U_SIM: C11.1 C30.1 IC2.30 IC2.33 IC7.5 R15.2 U1.1
USIM_CLK: C10.1 IC2.32 R16.1
USIM_DATA: C12.1 IC2.31 R17.1
VBAT: C18.2 C29.2 IC6.5 J2.1 J4.1 R23.2 R28.2
VBUS: IC2.24
pads on no net: IC2.3 IC2.4 IC2.7 IC2.8 IC2.11 IC2.12 IC2.13 IC2.14 IC2.19 IC2.21 IC2.25 IC2.26 IC2.34 IC2.35 IC2.36 IC2.37 IC2.38 IC2.40 IC2.41 IC2.42 IC2.43 IC2.44 IC2.47 IC2.48 IC2.51 IC2.53 IC2.67 IC2.68 IC2.69 IC2.70 IC2.71 IC2.72 IC2.73 IC2.74 IC2.75 IC2.76 IC2.77 IC2.78 IC2.79 IC2.80 IC2.81 IC2.82 IC2.83 IC2.84 IC2.85 IC2.86 IC2.87 IC2.88 IC2.101 IC2.102 IC2.103 IC2.104 IC2.105 IC2.106 IC2.107 IC2.108 IC2.109 IC2.110 IC2.111 IC2.112 IC2.113 IC2.114 IC2.115 IC2.117 IC2.118 IC2.119 IC2.120 IC2.121 IC2.122 IC2.123 IC2.124 IC3.4 IC7.4 J1.4 U1.6 U2.4 U2.5 U2.6 U2.7 U2.9 U2.17 U2.18 U2.19 U2.20 U2.21 U2.22 U2.26 U2.32 U3.7 U3.8 U3.9 U3.10 U3.11 U3.12 U3.15

## Text inside footprints (layer, text, board x,y; h text height)
C16: Top Overlay "+" at 14185.35,1662.8 h40
U2: Mechanical 13 "ANTENNA" at 11633.78,2809.33 h40